# Altium PCB QSTL_Nano_D_Con_Micro_DSUB.PcbDoc
Units mm, origin at the board's own origin, x right, y up, seen from the top; angles counter-clockwise.
Board outline 30 x 46 mm, 4 copper layers (Top Layer, Layer 1, Layer 2, Bottom Layer), stack 0.603 mm thick; 13 components, 25 nets, 119 pads, 311 vias.
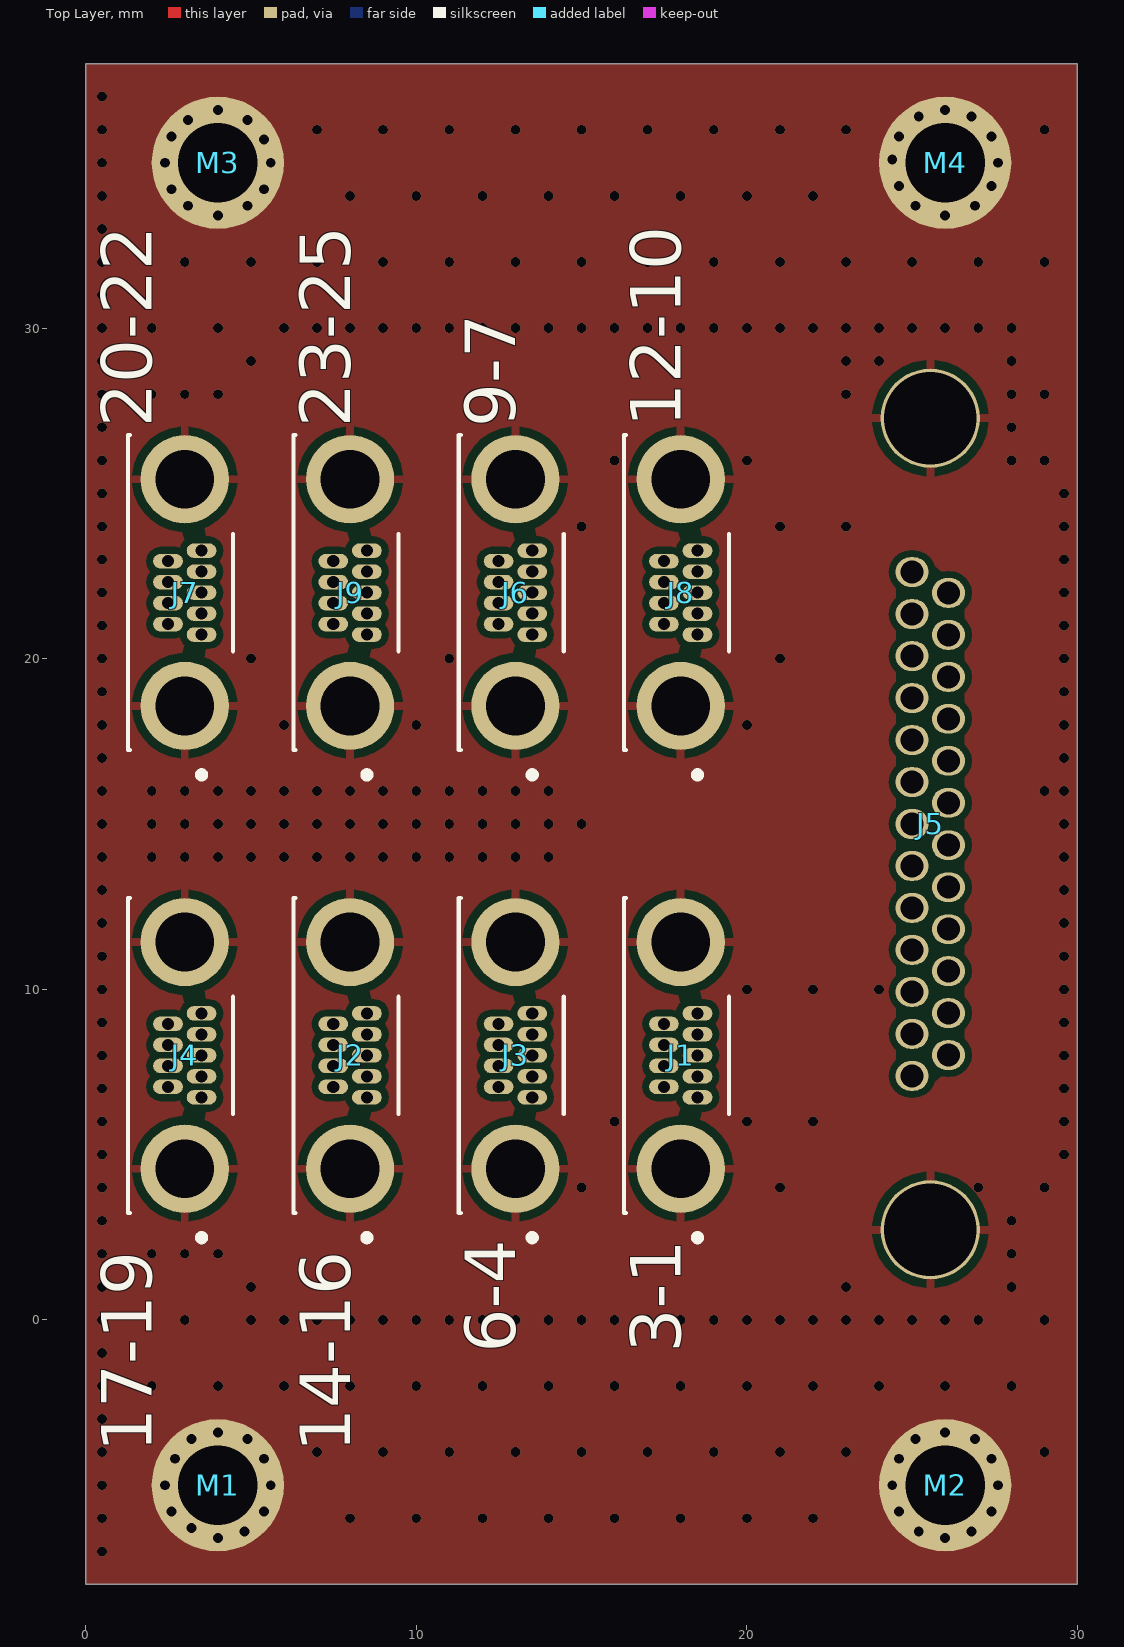
[diagram p0: Top Layer view]
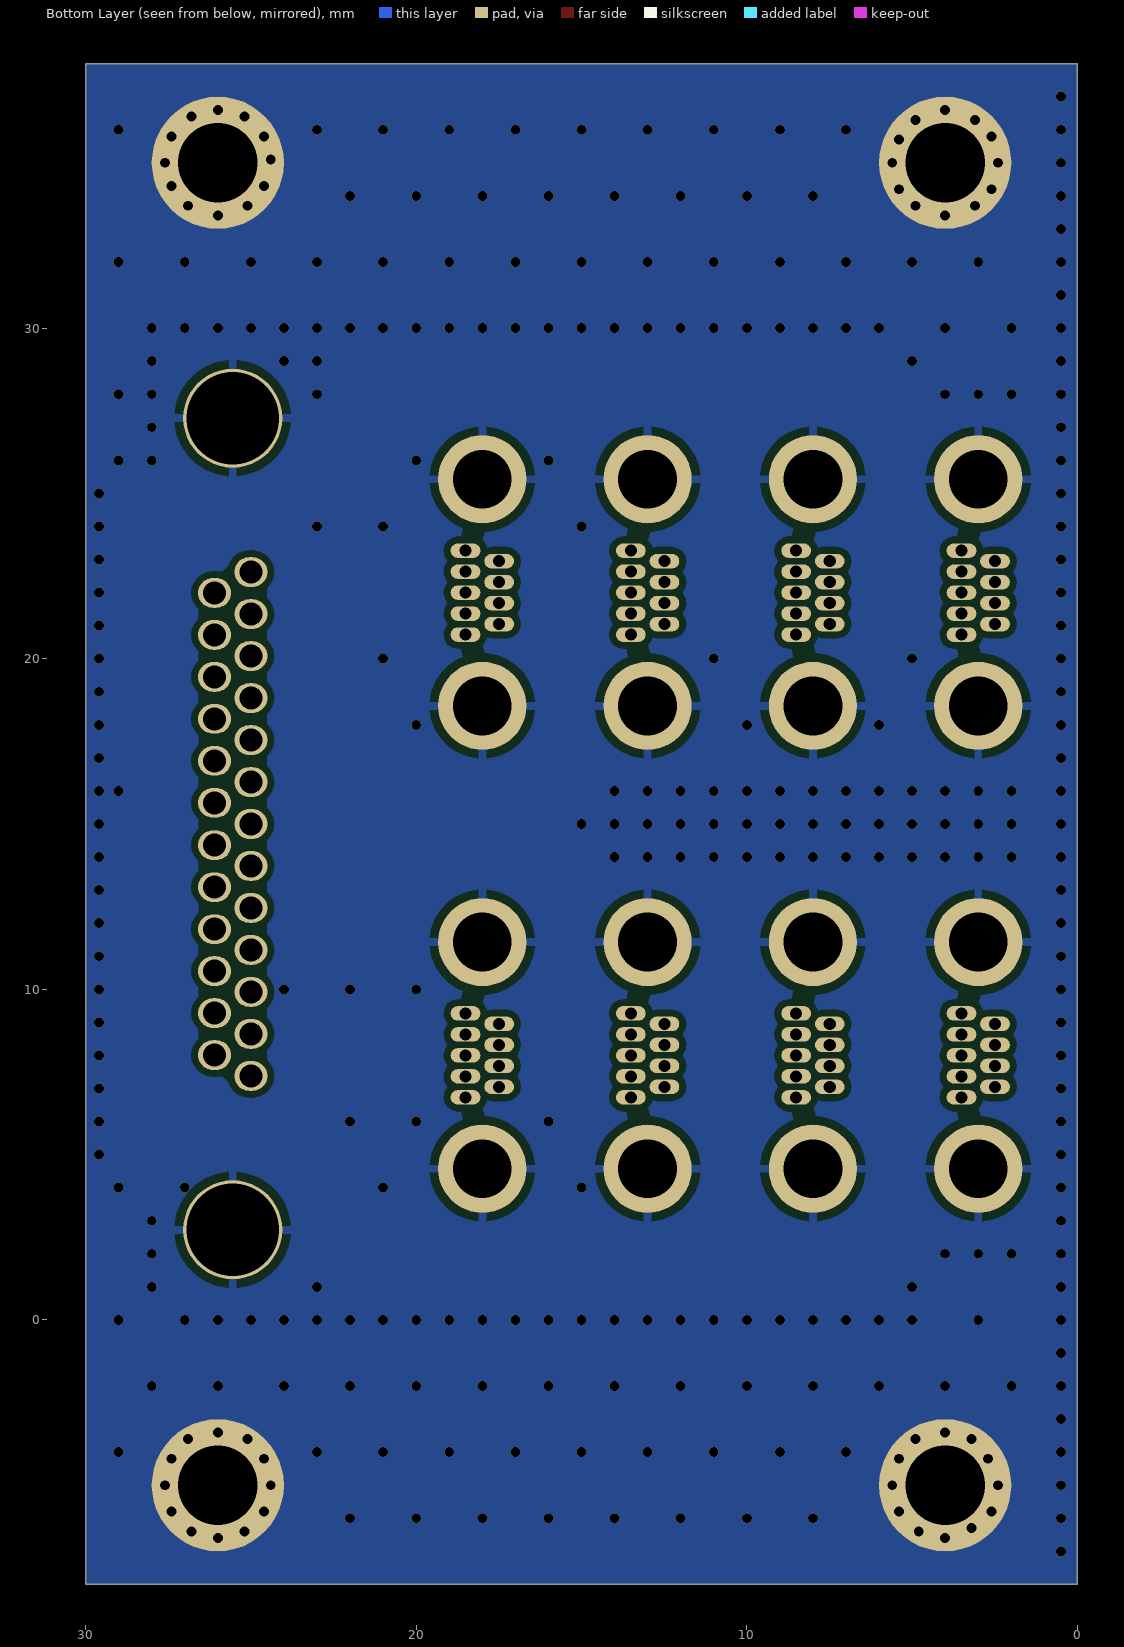
[diagram p1: Bottom Layer view, seen from below]
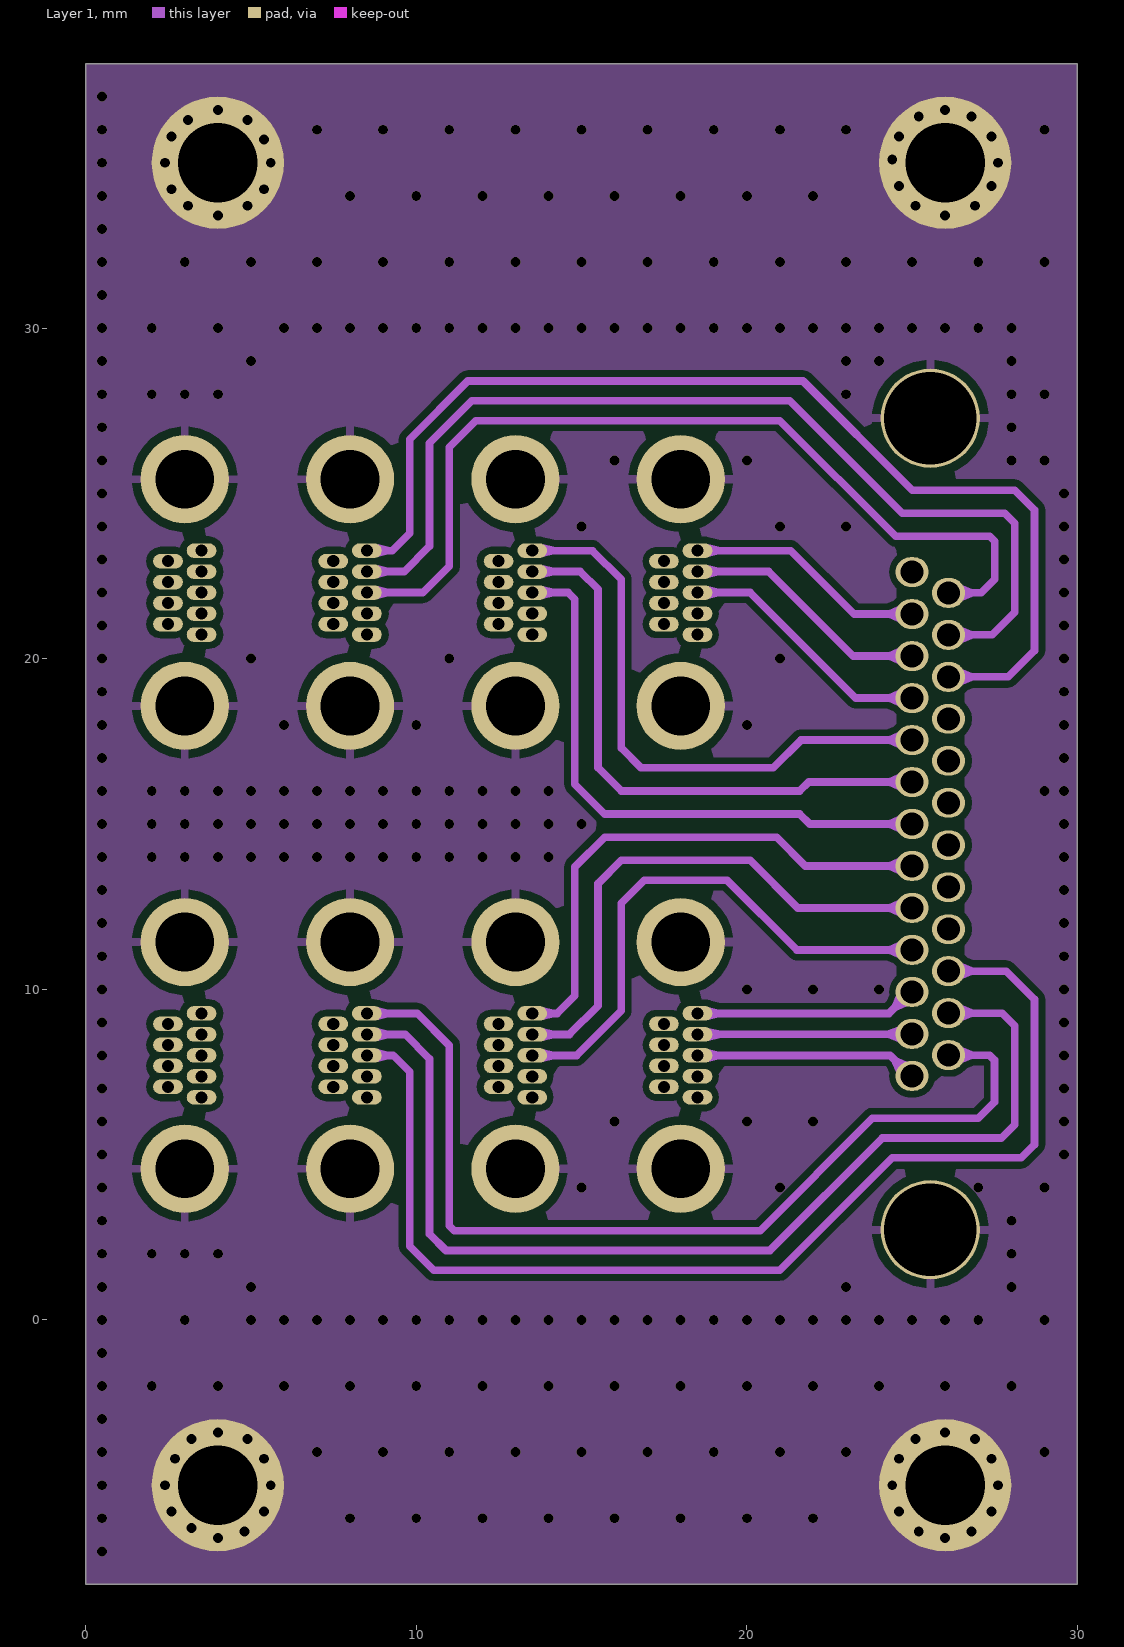
[diagram p2: Layer 1]
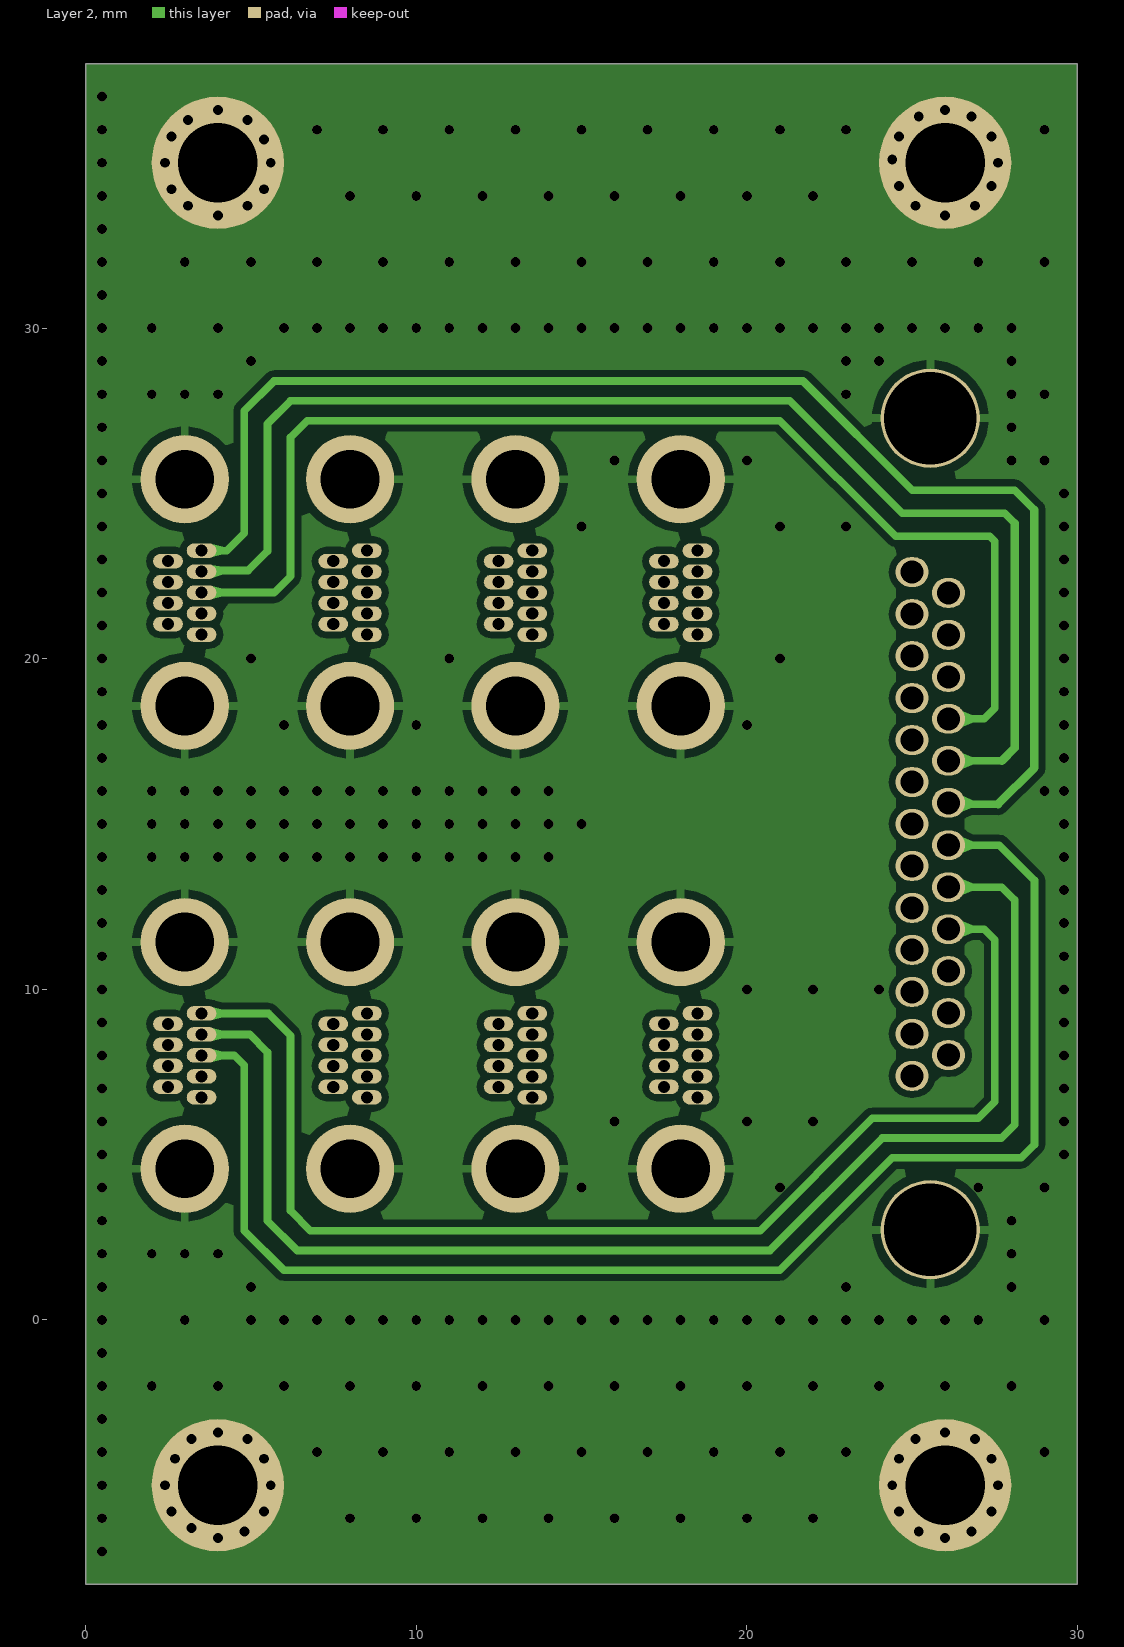
[diagram p3: Layer 2]
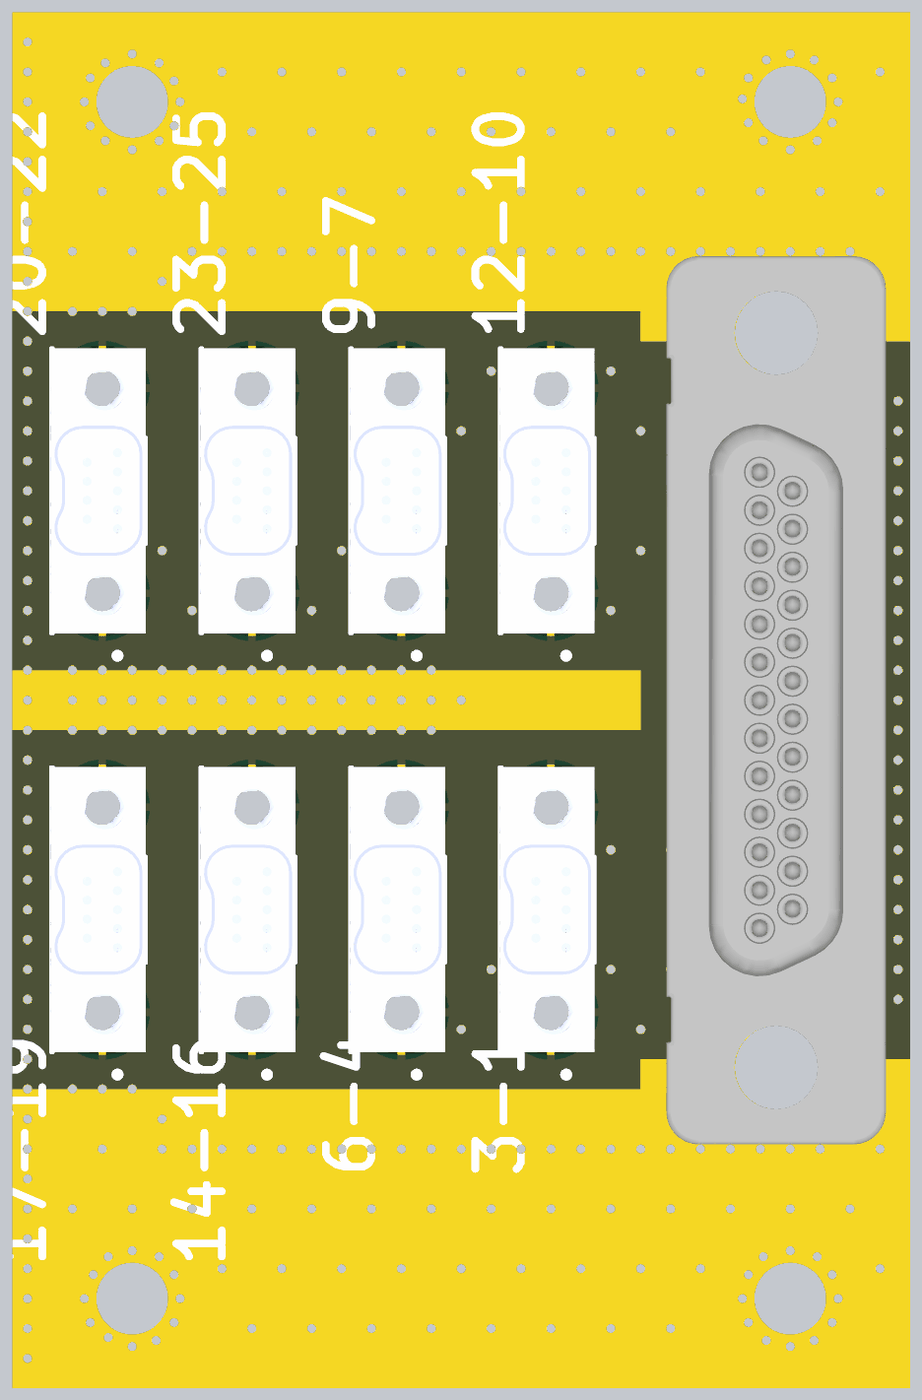
[diagram p4: 3D render of the assembled board from above, using the file's embedded part models]

## Layer stack, top to bottom
Top Solder: solder mask 0.0102, Solder Resist, Dk 3.5
Top Layer: signal copper 0.0356
Dielectric 2: prepreg 0.0711, PP-006, Dk 4.1
Layer 1: signal copper 0.035
Dielectric 1: dielectric 0.32, FR-4, Dk 4.8
Layer 2: signal copper 0.035
Dielectric 3: prepreg 0.0711, PP-006, Dk 4.1
Bottom Layer: signal copper 0.0356
Bottom Solder: solder mask 0.0102, Solder Resist, Dk 3.5

## Board outline
0,-8 0,38 30,38 30,-8

## Design rules (kind name [scope] priority, off if disabled: settings)
Clearance [All] p1: gap=0.2 ignorepadtopadclearanceinfootprint=FALSE except(0: Arc-Hole Track-Hole SMDPad-Hole THPad-Hole Via-Hole Fill-Hole Poly-Hole Region-Hole Text-Hole; 0.11: SMDPad-SMDPad SMDPad-THPad THPad-THPad; 0.254: Arc-Arc Arc-Track Track-Track)
PolygonConnect [All] p1: connectstyle=Relief reliefconductorwidth=0.254 reliefentries=4 polygonreliefangle="90 Angle" airgapwidth=0.254
RoutingVias [All] p1: holewidth=0.3 width=0.7 viastyle="Through Hole" minholewidth=0.3 minwidth=0.7 maxholewidth=0.711 maxwidth=1.27
SolderMaskExpansion [All] p1: expansion=0.09 istentingtop=FALSE
SupplyNets "Schematic Supply Nets" [InNet('GND')] p1: voltage=0.000
Width [All] p1: maxlimit=0.254 minlimit=0.254 preferedwidth=0.254
30 further rules are at their usual default settings.

## Components (designator, comment, footprint, x,y, rotation, side; value= is the part's Value field where it differs from the comment)
J1 "Nano D" A29500-009 18,8 r90 top
J2 "Nano D" A29500-009 8,8 r90 top locked
J3 "Nano D" A29500-009 13,8 r90 top locked
J4 "Nano D" A29500-009 3,8 r90 top locked
J5 "Micro DSUB" 380-025-113L001 25.55,15 r90 top locked
J6 "Nano D" A29500-009 13,22 r90 top locked
J7 "Nano D" A29500-009 3,22 r90 top locked
J8 "Nano D" A29500-009 18,22 r90 top locked
J9 "Nano D" A29500-009 8,22 r90 top locked
M1 "M2 Hole" M2_Hole 4,-5 r0 top locked
M2 "M2 Hole" M2_Hole 26,-5 r0 top locked
M3 "M2 Hole" M2_Hole 4,35 r0 top locked
M4 "M2 Hole" M2_Hole 26,35 r0 top locked

## Footprints (in the part's own frame and the unit in brackets; to place one, negate y for a bottom-side part, rotate by r counter-clockwise, add the part's x,y. Pads: shape width x height; smd on the part's side, far side on the other; paste and mask are expansions set on the pad)
380-025-113L001 [mm] "Plug Micro DSUB"
  oval 0.9x1 hole 0.7: 1(-7.62,0.55) 2(-6.35,0.55) 3(-5.08,0.55) 4(-3.81,0.55) 5(-2.54,0.55) 6(-1.27,0.55) 7(0,0.55) 8(1.27,0.55) 9(2.54,0.55) 10(3.81,0.55) 11(5.08,0.55) 12(6.35,0.55) 13(7.62,0.55) 14(-6.99,-0.55) 15(-5.72,-0.55) 16(-4.45,-0.55) 17(-3.18,-0.55) 18(-1.91,-0.55) 19(-0.64,-0.55) 20(0.64,-0.55) 21(1.91,-0.55) 22(3.18,-0.55) 23(4.45,-0.55) 24(5.72,-0.55) 25(6.99,-0.55)
  round 3 hole 2.8: SH1(12.275,0) SH2(-12.275,0)
  body extent -14.85,-3.65 14.85,3.7, height 10
A29500-009 [mil]
  oval 17.32x35.43 hole 14.5: 1(-50,-20) 2(-25,-20) 3(0,-20) 4(25,-20) 5(50,-20) 6(-37.5,20) 7(-12.5,20) 8(12.5,20) 9(37.5,20)
  round 105 hole 70: SH1(-135,0) SH2(135,0)
  silkscreen extent -221,-58 188,68, body extent -188,-58 188,68, height 225
M2_Hole [mm]
  round 4 hole 2.4: M2(0,0)

## Part data
J1 J2 J3 J4 J6 J7 J8 J9: library part A29500-009, "https://www.digikey.ca/en/products/detail/omnetics/A29500-009/16614880"
J5: library part 380-025-113L001, "NorComp Plug Micro DSUB"
M1 M2 M3 M4: library part M2_Hole

## Via types
v1: diameter 0.3, hole 0.3, Top Layer to Bottom Layer, tented both sides, 311 vias

## Nets (pads, with @x,y where several pads share a name; then routed paths per layer and width w, separated by ;. In a path a pad name is that pad's centre, name@x,y a point inside that pad or via, vN(x,y) a via of type N, cw(c..) or ccw(c..) an arc to the next point about the centre after c; other vN are vias at no path point)
1: J1.3 J5.1 | length 6.7
  Layer 1 w0.232: J1.3 24.33,8 24.95,7.38 J5.1
2: J1.4 J5.2 | length 6.5
  Layer 1 w0.232: J1.4 18.516,8.642 24.993,8.642 J5.2
3: J1.5 J5.3 | length 6.8
  Layer 1 w0.232: J1.5 24.3,9.27 24.95,9.92 J5.3
4: J3.3 J5.4 | length 16.5
  Layer 1 w0.232: J3.3 14.851,8 16.2,9.349 16.2,12.6 16.9,13.3 19.4,13.3 21.51,11.19 J5.4
5: J3.4 J5.5 | length 16.4
  Layer 1 w0.232: J3.4 14.635,8.635 15.5,9.5 15.5,13.2 16.2,13.9 20.1,13.9 21.54,12.46 J5.5
6: J3.5 J5.6 | length 16.3
  Layer 1 w0.232: J3.5 14.27,9.27 14.8,9.8 14.8,13.7 15.7,14.6 20.9,14.6 21.77,13.73 J5.6
7: J5.7 J6.3 | length 17.7
  Layer 1 w0.232: J6.3 14.6,22 14.8,21.8 14.8,16.2 15.7,15.3 21.6,15.3 21.9,15 J5.7
8: J5.8 J6.4 | length 17.5
  Layer 1 w0.232: J6.4 14.965,22.635 15.5,22.1 15.5,16.7 16.2,16 21.6,16 21.87,16.27 J5.8
9: J5.9 J6.5 | length 17.5
  Layer 1 w0.232: J6.5 15.33,23.27 16.2,22.4 16.2,17.3 16.8,16.7 20.8,16.7 21.64,17.54 J5.9
10: J5.10 J8.3 | length 7.8
  Layer 1 w0.232: J8.3 20.1,22 23.29,18.81 J5.10
11: J5.11 J8.4 | length 7.6
  Layer 1 w0.232: J8.4 20.665,22.635 23.22,20.08 J5.11
12: J5.12 J8.5 | length 7.3
  Layer 1 w0.232: J8.5 21.33,23.27 23.25,21.35 J5.12
14: J2.5 J5.14 | length 29.2
  Layer 1 w0.232: J2.5 10.03,9.27 11,8.3 11,2.849 11.149,2.7 20.4,2.7 23.8,6.1 27,6.1 27.49,6.59 27.49,7.861 27.341,8.01 J5.14
15: J2.4 J5.15 | length 32.1
  Layer 1 w0.232: J2.4 9.665,8.635 10.4,7.9 10.4,2.6 10.9,2.1 20.7,2.1 24.1,5.5 27.692,5.5 28.1,5.908 28.1,8.9 27.72,9.28 J5.15
16: J2.3 J5.16 | length 34.9
  Layer 1 w0.232: J2.3 9.3,8 9.8,7.5 9.8,2.229 10.529,1.5 21,1.5 24.4,4.9 28.3,4.9 28.7,5.3 28.7,9.7 27.85,10.55 J5.16
17: J4.5 J5.17 | length 37.9
  Layer 2 w0.232: J4.5 5.53,9.27 6.2,8.6 6.2,3.3 6.8,2.7 20.4,2.7 23.8,6.1 27,6.1 27.5,6.6 27.5,11.5 27.18,11.82 J5.17
18: J4.4 J5.18 | length 40.8
  Layer 2 w0.232: J4.4 4.965,8.635 5.5,8.1 5.5,3 6.4,2.1 20.7,2.1 24.1,5.5 27.7,5.5 28.1,5.9 28.1,12.7 27.71,13.09 J5.18
19: J4.3 J5.19 | length 43.4
  Layer 2 w0.232: J4.3 4.5,8 4.8,7.7 4.8,2.7 6,1.5 21,1.5 24.4,4.9 28.3,4.9 28.7,5.3 28.7,13.3 27.64,14.36 J5.19
20: J5.20 J7.5 | length 42
  Layer 2 w0.232: J7.5 4.27,23.27 4.8,23.8 4.8,27.5 5.7,28.4 21.7,28.4 25,25.1 28.1,25.1 28.7,24.5 ; J5.20 26.14,15.6 27.6,15.6
  Layer 2 w0.254: 27.6,15.6 28.7,16.7 28.7,24.5
21: J5.21 J7.4 | length 39.5
  Layer 2 w0.232: J7.4 3.542,22.669 4.92,22.669 5.5,23.249 5.5,27.1 6.2,27.8 21.3,27.8 24.7,24.4 27.8,24.4 28.1,24.1 ; J5.21 27.71,16.91
  Layer 2 w0.254: 27.71,16.91 28.1,17.3 28.1,24.1
22: J5.22 J7.3 | length 36.7
  Layer 2 w0.232: J7.3 5.7,22 6.2,22.5 6.2,26.7 6.7,27.2 21,27.2 24.5,23.7 27.351,23.7 27.5,23.551 27.5,18.5 27.18,18.18 J5.22
23: J5.23 J9.5 | length 32.8
  Layer 1 w0.232: J9.5 9.27,23.27 9.8,23.8 9.8,26.637 11.563,28.4 21.7,28.4 25,25.1 28.1,25.1 28.7,24.5 28.7,20.242 27.908,19.45 J5.23
24: J5.24 J9.4 | length 30.1
  Layer 1 w0.232: J9.4 9.635,22.635 10.4,23.4 10.4,26.518 11.682,27.8 21.3,27.8 24.7,24.4 27.8,24.4 28.1,24.1 28.1,21.4 27.42,20.72 J5.24
25: J5.25 J9.3 | length 27.5
  Layer 1 w0.232: J9.3 10.2,22 11,22.8 11,26.4 11.8,27.2 21,27.2 24.5,23.7 27.351,23.7 27.5,23.551 27.5,22.4 27.09,21.99 J5.25
GND: J1.SH1 J1.SH2 J2.SH1 J2.SH2 J3.SH1 J3.SH2 J4.SH1 J4.SH2 J5.SH1 J5.SH2 J6.SH1 J6.SH2 J7.SH1 J7.SH2 J8.SH1 J8.SH2 J9.SH1 J9.SH2 M1.M2 M2.M2 M3.M2 M4.M2
  other v1: 0.5,-7 4,-6.6 26,-6.6 4.8,-6.4 25.2,-6.4 26.8,-6.4 3.2,-6.3 0.5,-6 8,-6 10,-6 12,-6 14,-6 16,-6 18,-6 20,-6 22,-6 2.6,-5.8 5.4,-5.8 24.6,-5.8 27.4,-5.8 0.5,-5 2.4,-5 5.6,-5 24.4,-5 27.6,-5 2.7,-4.2 5.4,-4.2 24.6,-4.2 27.4,-4.2 0.5,-4 7,-4 9,-4 11,-4 13,-4 15,-4 17,-4 19,-4 21,-4 23,-4 29,-4 3.2,-3.6 4.9,-3.6 25.1,-3.6 26.9,-3.6 4,-3.4 26,-3.4 0.5,-3 0.5,-2 2,-2 4,-2 6,-2 8,-2 10,-2 12,-2 14,-2 16,-2 18,-2 20,-2 22,-2 24,-2 26,-2 28,-2 0.5,-1 0.5,0 3,0 5,0 6,0 7,0 8,0 9,0 10,0 11,0 12,0 13,0 14,0 15,0 16,0 17,0 18,0 19,0 20,0 21,0 22,0 23,0 24,0 25,0 26,0 27,0 29,0 0.5,1 5,1 23,1 28,1 0.5,2 2,2 3,2 4,2 28,2 0.5,3 28,3 0.5,4 15,4 21,4 27,4 29,4 0.5,5 29.6,5 0.5,6 16,6 20,6 22,6 29.6,6 0.5,7 29.6,7 0.5,8 29.6,8 0.5,9 29.6,9 0.5,10 20,10 22,10 24,10 29.6,10 0.5,11 29.6,11 0.5,12 29.6,12 0.5,13 29.6,13 0.5,14 2,14 3,14 4,14 5,14 6,14 7,14 8,14 9,14 10,14 11,14 12,14 13,14 14,14 29.6,14 0.5,15 2,15 3,15 4,15 5,15 6,15 7,15 8,15 9,15 10,15 11,15 12,15 13,15 14,15 15,15 29.6,15 0.5,16 2,16 3,16 4,16 5,16 6,16 7,16 8,16 9,16 10,16 11,16 12,16 13,16 14,16 29,16 29.6,16 0.5,17 29.6,17 0.5,18 6,18 10,18 20,18 29.6,18 0.5,19 29.6,19 0.5,20 5,20 11,20 21,20 29.6,20 0.5,21 29.6,21 0.5,22 29.6,22 0.5,23 29.6,23 0.5,24 15,24 21,24 23,24 29.6,24 0.5,25 29.6,25 0.5,26 16,26 20,26 28,26 29,26 0.5,27 28,27 0.5,28 2,28 3,28 4,28 23,28 28,28 29,28 0.5,29 5,29 23,29 24,29 28,29 0.5,30 2,30 4,30 6,30 7,30 8,30 9,30 10,30 11,30 12,30 13,30 14,30 15,30 16,30 17,30 18,30 19,30 20,30 21,30 22,30 23,30 24,30 25,30 26,30 27,30 28,30 0.5,31 0.5,32 3,32 5,32 7,32 9,32 11,32 13,32 15,32 17,32 19,32 21,32 23,32 25,32 27,32 29,32 0.5,33 4,33.4 26,33.4 3.1,33.7 4.9,33.7 25.1,33.7 26.9,33.7 0.5,34 8,34 10,34 12,34 14,34 16,34 18,34 20,34 22,34 2.6,34.2 5.4,34.2 24.6,34.3 27.4,34.3 0.5,35 2.4,35 5.6,35 27.6,35 24.4,35.1 5.4,35.7 2.6,35.8 24.6,35.8 27.4,35.8 0.5,36 7,36 9,36 11,36 13,36 15,36 17,36 19,36 21,36 23,36 29,36 3.1,36.3 4.9,36.3 25.2,36.4 26.8,36.4 4,36.6 26,36.6 0.5,37
pads on no net: J1.1 J1.2 J1.6 J1.7 J1.8 J1.9 J2.1 J2.2 J2.6 J2.7 J2.8 J2.9 J3.1 J3.2 J3.6 J3.7 J3.8 J3.9 J4.1 J4.2 J4.6 J4.7 J4.8 J4.9 J5.13 J6.1 J6.2 J6.6 J6.7 J6.8 J6.9 J7.1 J7.2 J7.6 J7.7 J7.8 J7.9 J8.1 J8.2 J8.6 J8.7 J8.8 J8.9 J9.1 J9.2 J9.6 J9.7 J9.8 J9.9

## Polygon pours and split planes (outlines as drawn)
no net on Top Solder "NONET_L03_P-001" (solid): 0,-8 30,-8 30,38 0,38
no net on Bottom Solder "NONET_L03_P-001" (solid): 0,-8 30,-8 30,38 0,38
GND on Bottom Layer "GND_L04_P000" (solid, remove dead copper, pour order 0): 0,-8 30,-8 30,38 0,38
GND on Top Layer "GND_L01_P001" (solid, remove dead copper, pour order 1): 0,-8 30,-8 30,38 0,38
GND on Layer 1 "GND_L02_P002" (solid, remove dead copper, pour order 2): 0,-8 30,-8 30,38 0,38
GND on Layer 2 "GND_L03_P003" (solid, remove dead copper, pour order 3): 0,-8 30,-8 30,38 0,38

## Silkscreen, mask and mechanical layers (free items; w line width, h text height)
Top Overlay:
  text "20-22" at 2,27 h1.52 r90
  text "23-25" at 8,27 h1.52 r90
  text "9-7" at 13,27 h1.52 r90
  text "12-10" at 18,27 h1.52 r90
  text "6-4" at 13,-1 h1.52 r90
  text "3-1" at 18,-1 h1.52 r90
  text "17-19" at 2,-4 h1.52 r90
  text "14-16" at 8,-4 h1.52 r90
Top Solder:
  pour cut-out: 21,27 30,27 30,3 21,3
  pour cut-out: 0,14 21,14 21,2 0,2
  pour cut-out: 0,28 21,28 21,16 0,16
Bottom Solder:
  pour cut-out: 0,14 21,14 21,2 0,2
  pour cut-out: 0,28 21,28 21,16 0,16
  pour cut-out: 21,27 30,27 30,3 21,3
Mechanical 1:
  the board outline again, w0.254